# Altium PCB lte-router_V3.PcbDoc (part 2 of 2)
Units mm, origin at the board's own origin, x right, y up, seen from the top; angles counter-clockwise.
Board outline 80 x 50 mm, 4 copper layers (Top Layer, Inner Layer 2, Inner Layer 3, Bottom Layer), stack 1.443 mm thick; 105 components, 103 nets, 432 pads, 350 vias.
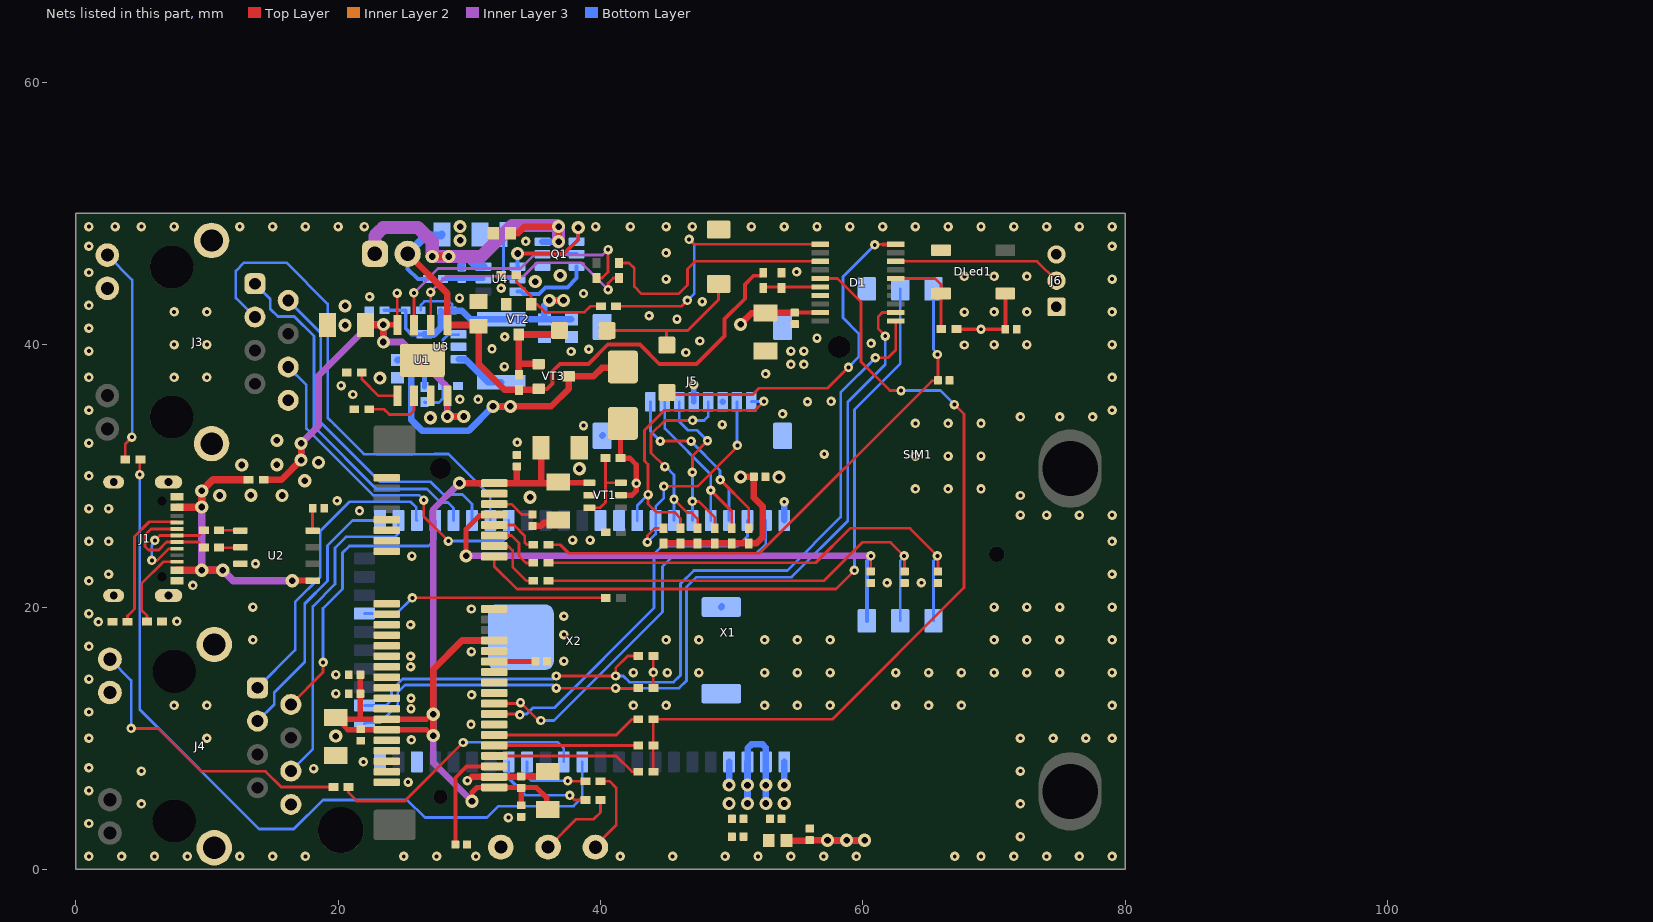
[diagram p4: the nets of this part, all layers, seen from the top]

## Via types
v1: diameter 0.72, hole 0.3, Top Layer to Bottom Layer, tented both sides, 291 vias
v2: diameter 1, hole 0.5, Top Layer to Bottom Layer, tented both sides, 59 vias

## Nets (pads, with @x,y where several pads share a name; then routed paths per layer and width w, separated by ;. In a path a pad name is that pad's centre, name@x,y a point inside that pad or via, vN(x,y) a via of type N, cw(c..) or ccw(c..) an arc to the next point about the centre after c; other vN are vias at no path point) (continued)
GND: C1.2 C2.2 C3.2 C4.1 C5.1 C6.2 C7.2 C8.2 C9.2 C10.1 C11.1 C12.1 C13.2 C14.1 C15.1 C16.1 C17.1 C18.2 C19.1 C20.1 C21.1 C22.1 C24.1 C25.1 C26.1 C27.1 C28.1 C29.2 C30.2 C32.2 C33.1 C34.2 D1.7 DLed1.3 GND.1 J1.1 J1.12 J1.SH J3.8 J3.MH1 J3.MH2 J4.8 J4.MH1 J4.MH2 J5.6 J5.9 J5.10 J5.11 J5.12 J6.1 J6.3 Q1.1 R3.1 R4.1 R5.1 R6.1 R9.2 R10.2 R20.1 R26.1 R32.1 R37.1 R39.1 SIM1.5 SW1.1 U1.3 U1.9 U2.3 U3.2 VT1.5 VT2.2 X1.4 X1.9 X1.15 X1.18 X1.21 X1.26 X1.27 X1.29 X1.34 X1.35 X1.37 X1.40 X1.43 X1.50 X2.1 X2.4 X2.21 X2.23 X2.46 X2.47 X2.56 X2.57 X2.58 X2.59 | length 14.2
  Top Layer w0.21: v1@13.69,23.29 v1(13.7,23.3)
  Top Layer w0.221: v1(20.225,36.875) v1@20.285,36.936
  Top Layer w0.3: v1(21.125,36.2) v1@21.175,36.15 ; R4.1@21.175,35.125 R4.1@21.225,35.075
  Top Layer w0.4: v1(32.973,3.948) v1@32.98,3.955 ; v1@33.625,32.525 v1(33.65,32.55)
  Top Layer w0.5: v1(29.851,6.775) 29.911,6.775 30.186,7.05 X1.50@31.9,7.05 33.91,7.05 C12.1@33.95,7.09 35.59,7.09 C3.2@35.975,7.475 ; C30.2@34.81,26.18 35.455,26.18 35.714,26.439 36.609,26.439 C13.2@36.79,26.62 ; v2@38.382,30.547 v2(38.39,30.54) ; C24.1@52.565,29.925 C24.1@52.59,29.9
  Inner Layer 3 w0.5: v1@61.825,21.85 v1(61.85,21.85)
  Inner Layer 2 w0.21: v1@30.15,13.475 v1@30.175,13.45
  Bottom Layer w0.5: v1@22.375,43.625 v1(22.4,43.65) ; v2(23.176,37.452) v2@23.199,37.475 ; J5.12@40.125,33.05 J5.12@40.175,33.1 ; J5.11@40.125,41.3 40.1,41.325 J5.11@40.125,41.35 ; X2.57@49.2,20 X2.57@49.25,20.05 ; v2(49.8,6.425) X2.4@49.8,8.2 ; v2(54,6.425) X2.1@54,8.2 ; X2.56@54,26.6 v1(54,28.025)
  other v1: 1,1 3.5,1 6,1 8.5,1 12.5,1 15,1 17.5,1 25,1 27.5,1 30.5,1 41.5,1 45.5,1 49.5,1 52,1 54.5,1 57,1 59.5,1 67,1 69,1 71.5,1 74,1 76.5,1 79,1 72,2.5 1,3.5 5,5 72,5 1,6 25.326,6.65 5,7.5 72,7.5 18.125,7.68 1,7.75 21.925,8.2 25.575,9.875 1,10 10,10 72,10 74.5,10 77,10 79,10 30.125,11.05 1,12 25.55,12.25 7.5,12.5 10,12.5 42.5,12.5 45,12.5 52.5,12.5 55,12.5 57.5,12.5 62.5,12.5 65,12.5 67.5,12.5 79,12.5 25.55,13.05 30.175,13.3 19.825,13.4 1,14.5 19.825,14.85 42.5,15 45.1,15 47.5,15 52.5,15 55,15 57.5,15 62.5,15 65,15 67.5,15 70,15 72.5,15 75,15 79,15 25.525,15.45 37.2,15.875 25.525,16.25 30.15,16.6 1,17 13.5,17.5 45,17.5 47.5,17.5 52.5,17.5 55,17.5 57.5,17.5 70,17.5 72.5,17.5 75,17.5 79,17.5 37.2,17.9 25.525,18.65 1.725,18.875 7.7,18.9 37.2,19.3 1,19.5 30.15,19.85 13.5,20 70,20 72.5,20 75,20 79,20 8.925,21.65 64.45,21.85 1,22 2.5,22.5 79,22.5 25.625,23.875 1,25 2.5,25 79,25 37.875,25.1 39.2,25.1 72,27 74,27 76.5,27 79,27 21.626,27.326 1,27.5 2.5,27.5 19.925,28.1 72,28.5 64,29 66.5,29 69,29 1,30 64,31.5 66.5,31.5 69,31.5 57.05,31.65 1,32.5 38.7,33.825 49.275,33.9 64,34 66.5,34 69,34 72,34.5 75,34.5 77.5,34.5 53.875,34.725 1,35 79,35 55.775,35.65 57.575,35.675 29.275,35.825 30.675,35.825 1,37.5 7.5,37.5 10,37.5 79,37.5 52.575,37.775 32.675,38.325 54.5,38.5 55.5,38.5 46.5,39.402 37.752,39.477 1,39.5 54.5,39.5 55.5,39.5 39.1,39.65 31.725,39.675 67.725,39.975 7.5,40 10,40 70,40 72.5,40 79,40 60.625,40.1 47.577,40.277 56.5,40.5 32.7,40.6 1,41.25 45.827,41.952 43.702,42.202 67.725,42.475 7.5,42.5 10,42.5 70,42.5 72.5,42.5 79,42.5 1,43 47.75,43.275 29.25,43.55 38.7,43.9 32.425,44.3 45,45 79,45 67.725,45.2 70,45.2 72.5,45.2 1,45.5 54.95,45.55 45,47 1,47.5 79,47.5 34.3,47.875 1,49 3,49 5,49 7.5,49 12.5,49 15,49 17.5,49 20,49 22,49 39.625,49 42.275,49 45,49 47,49 51.5,49 54,49 56.5,49 59,49 61.5,49 64,49 66.5,49 69,49 71.5,49 74,49 76.5,49 79,49
  other v2: 49.8,5.025 54,5.025 19.82,10.16 34.63,28.37 10.975,28.5 15.725,28.5 13.35,28.525 17.45,29.625 53.6,29.9 12.65,30.825 15.325,30.85 18.5,31.025 15.325,32.7 27.026,34.427 20.525,41.475 20.525,42.95 35.025,44.8 36.925,45.275 29.3,47.95 29.3,49
HLK-7688A_EPHY_LED0: J4.9 R36.1 | length 23.2
  Top Layer w0.21: v1(4.225,10.75) 6.3,10.75 9.57,7.48 14.462,7.48 15.662,6.28 R36.1@19.635,6.28
  Bottom Layer w0.21: J4.9@2.605,16.025 4.225,14.405 v1(4.225,10.75)
HLK-7688A_EPHY_LED1: J3.9 R35.1 | length 16.6
  Top Layer w0.21: R35.1@3.775,31.25 3.775,32.45 v1(4.275,32.95)
  Bottom Layer w0.21: J3.9@2.405,46.825 4.3,44.93 4.3,32.975 v1(4.275,32.95)
HLK-7688A_MDI_RN_P0: J4.6 X2.35 | length 24.7
  Bottom Layer w0.21: J4.6@16.395,7.495 18.07,9.17 18.07,20.05 19.763,21.743 19.763,24.513 20.6,25.35 24.325,25.35 24.583,25.608 24.583,26.583 X2.35@24.6,26.6
HLK-7688A_MDI_RN_P1: J3.6 X2.41 | length 26.3
  Top Layer w0.21: v1(26.525,28.15) 26.525,26.9 v1(28.4,25.025)
  Bottom Layer w0.21: J3.6@16.195,38.295 17.575,36.915 17.575,33.6 22.65,28.525 26.153,28.525 26.525,28.153 v1(26.525,28.15) ; v1(28.4,25.025) 32.575,25.025 33,25.45 X2.41@33,26.6
HLK-7688A_MDI_RP_P0: J4.3 X2.34 | length 20.4
  Bottom Layer w0.21: J4.3@13.855,11.305 15.125,12.575 15.125,13.5 17.45,15.825 17.45,20.25 19.188,21.988 19.188,24.687 21.1,26.6 X2.34@23.2,26.6
HLK-7688A_MDI_RP_P1: J3.3 X2.40 | length 38.1
  Bottom Layer w0.21: J3.3@13.655,42.105 12.2,43.56 12.2,45.625 12.825,46.25 16.05,46.25 19.2,43.1 19.2,34.425 19.747,33.878 21.975,31.65 27.323,31.65 27.338,31.665 28.41,31.665 31.6,28.475 X2.40@31.6,26.6
HLK-7688A_MDI_TN_P0: J4.2 X2.37 | length 22.1
  Top Layer w0.21: J4.2@16.395,12.575 18.85,15.03 v1(18.85,15.775)
  Bottom Layer w0.21: v1(18.85,15.775) 18.85,19.9 20.338,21.388 20.338,24.138 20.85,24.65 26.875,24.65 27.4,25.175 X2.37@27.4,26.6
HLK-7688A_MDI_TN_P1: J3.2 X2.39 | length 25.7
  Bottom Layer w0.21: J3.2@16.195,43.375 18.675,40.895 18.675,34.075 23.2,29.55 27.05,29.55 28.025,28.575 29.475,28.575 30.2,27.85 X2.39@30.2,26.6
HLK-7688A_MDI_TP_P0: J4.1 X2.36 | length 23.4
  Bottom Layer w0.21: J4.1@13.855,13.845 16.725,16.715 16.725,20.375 18.638,22.288 18.638,25.787 20.875,28.025 25.525,28.025 25.958,27.592 25.958,26.642 X2.36@26,26.6
HLK-7688A_MDI_TP_P1: J3.1 X2.38 | length 27.7
  Bottom Layer w0.21: J3.1@13.655,44.645 14.825,43.475 14.825,42.725 15.4,42.15 16.65,42.15 18.15,40.65 18.15,33.75 22.9,29 26.775,29 27.8,27.975 28.375,27.975 28.8,27.55 X2.38@28.8,26.6
HLK-7688A_UART_RXD1: R22.1 RX.1 | length 5.9
  Top Layer w0.21: RX.1@36.1,1.8 38.125,3.825 39.475,3.825 40,4.35 R22.1@40,5.3
HLK-7688A_UART_TXD1: R21.1 TX.1 | length 6.5
  Top Layer w0.21: TX.1@39.609,1.805 41.2,3.396 41.2,6.2 40.675,6.725 R21.1@40,6.725
LTE_LED: D1.5 R16.2 R17.2 R18.2 | length 63
  Top Layer w0.21: R18.2@44.025,7.45 R17.2@44.025,9.45 R16.2@44.025,11.45 57.675,11.45 67.7,21.475 67.7,34.7 v1(66.975,35.425) ; D1.5@56.75,45.05 58.05,45.05 59.85,43.25 59.85,38.7 62.05,36.5 v1(62.9,36.5)
  Bottom Layer w0.21: v1(62.9,36.5) 65.9,36.5 v1(66.975,35.425)
NetC6_1: C6.1 C32.1 J2.2 R19.2 R23.2 R38.2 U1.5 VT3.2 | length 47.6
  Top Layer w0.3: VT3.2@35.275,36.625 35.925,36.625 36.35,37.05 36.35,37.975 36.9,38.525 39.075,38.525 40.55,40 43,40 44.475,38.525 47.325,38.525 49.45,40.65 49.45,41.95 51,43.5 51,44.597 51.653,45.25 52.25,45.25 52.4,45.4 R23.2@52.4,45.475
  Top Layer w0.5: J2.2@25.3,46.925 28.33,43.895 U1.5@28.33,41.5 30.61,41.5 C6.1@30.7,41.41 30.7,38.55 32.7,36.55 R19.2@33.775,36.55 35.2,36.55 VT3.2@35.275,36.625
  Bottom Layer w0.3: J2.2@25.3,46.925 25.3,45.775 26.075,45 R38.2@26.85,45
  Bottom Layer w0.6: J2.2@25.3,46.925 26.701,48.326 27.826,48.326 C32.1@27.9,48.4
NetC7_1: C7.1 U2.8 | length 1.7
  Top Layer w0.21: U2.8@18.05,25.83 18.05,27.515 C7.1@18.06,27.525
NetC8_1: C8.1 R2.2 U1.4 U1.8 | length 39.6
  Top Layer w0.21: U1.8@24.495,41.525 24.5,41.53 v1(24.5,43.925)
  Top Layer w0.4: v2(23.45,41.525) U1.8@24.495,41.525 ; v1(24.5,43.925) 24.5,43.975 v1@24.52,43.995 ; v2(28.325,34.525) 28.325,34.536 28.33,34.541 U1.4@28.33,36.1
  Top Layer w0.5: R2.2@14.325,29.7 15.675,29.7 v2(17.175,31.2) v2(17.175,32.475) ; C8.1@22.1,41.5 v2@23.4,41.5 ; v2(23.45,40.2) v2@23.45,41.45 ; v2(28.325,34.525) v2(29.575,34.525)
  Inner Layer 3 w0.5: v2(17.175,31.2) v2(17.175,32.475) 18.5,33.8 18.5,37.625 22.425,41.55 v2@23.45,41.55 ; v2(23.45,41.525) v2(23.45,40.2) 24.875,40.2 28.325,36.75 v2(28.325,34.525) v2(29.575,34.525)
  Bottom Layer w0.5: v2(28.325,34.525) v2(29.575,34.525)
NetC15_2: C15.2 C16.2 C17.2 L1.2 X2.2 X2.3 | length 10.1
  Bottom Layer w0.5: v2(51.2,5.025) v2(51.2,6.425) X2.3@51.2,8.2 51.207,8.207 51.207,9.232 51.5,9.525 52.35,9.525 52.6,9.275 X2.2@52.6,8.2 v2(52.6,6.425) v2(52.6,5.025)
NetC23_1: C23.1 R31.1 R32.2 U3.5 | length 7.4
  Bottom Layer w0.3: R32.2@23.525,42.62 R31.1@25.15,42.62 25.15,41.225 25.6,40.775 U3.5@26.575,40.775
  Bottom Layer w0.5: U3.5@26.575,40.775 27.3,40.775 27.835,41.31 C23.1@27.835,42.6
NetC28_2: C28.2 X1.28 | length 3.1
  Top Layer w0.4: X1.28@31.9,15.85 35.02,15.85 C28.2@35.04,15.87
NetC29_1: C29.1 X1.48 | length 8.4
  Top Layer w0.3: C29.1@28.93,1.9 28.93,6.99 29.79,7.85 X1.48@31.9,7.85
NetC30_1: C30.1 X1.6 | length 3.2
  Top Layer w0.21: X1.6@31.9,27.85 31.91,27.84 33.21,27.84 33.99,27.06 C30.1@34.81,27.06
NetC31_1: C31.1 J2.1 Q1.3 R20.2 U4.6 | length 33.2
  Top Layer w0.5: R20.2@33.125,48.5 33.725,48.5 34.225,49 v2(36.8,49) v2@36.8,47.829
  Top Layer w0.6: v2(27.175,46.72) v2(28.425,46.72)
  Inner Layer 3 w0.5: v2@36.8,47.829 v2@36.802,47.827
  Inner Layer 3 w1: J2.1@22.8,46.925 22.8,48.287 23.07,48.557 23.07,48.57 23.425,48.925 26.1,48.925 27.175,47.85 v2(27.175,46.72) v2(28.425,46.72) 30.895,46.72 33.265,49.09 36.71,49.09 v2(36.8,49) v2@36.8,47.829
  Bottom Layer w0.5: Q1.3@35.575,47.85 35.586,47.839 36.79,47.839 36.802,47.827 v2@36.802,48.998
  Bottom Layer w0.6: v2(27.175,46.72) v2(28.425,46.72) 29.362,46.72 ; C31.1@29.425,45.89 29.425,46.657 29.362,46.72 ; U4.6@31.07,45.95 30.525,45.95 29.755,46.72 29.362,46.72
  other v2: 36.802,47.85
NetC31_2: C31.2 R38.1 U4.5 | length 3.1
  Bottom Layer w0.3: R38.1@28,45 28.058,45 28.065,44.992 29.408,44.992 C31.2@29.425,45.01 29.435,45 U4.5@31.07,45
NetD1_6: D1.6 R23.1 R39.2 | length 4.3
  Top Layer w0.21: R23.1@52.4,44.4 53.9,44.4 D1.6@56.75,44.4
NetD1_16: D1.16 DLed1.4 R46.1 | length 7
  Top Layer w0.21: D1.16@62.5,45.05 65.5,45.05 65.95,44.6 DLed1.4@65.95,43.9 65.95,41.225 R46.1@65.975,41.2
NetJ1_4: J1.4 R10.1 | length 10.4
  Top Layer w0.21: R10.1@3.95,18.875 3.95,19.329 4.475,19.854 4.475,25.375 5.6,26.5 7.192,26.5 7.202,26.49 7.67,26.49 J1.4@7.71,26.45
NetJ1_5: J1.5 J1.7 R8.2 | length 8.5
  Top Layer w0.21: J1.5@7.71,25.95 5.725,25.95 5.275,25.5 5.275,24.625 5.55,24.35 6.325,24.35 6.925,24.95 J1.7@7.71,24.95 9.35,24.95 R8.2@9.775,24.525
NetJ1_6: J1.6 J1.8 R7.2 | length 8.1
  Top Layer w0.21: v1(5.8,23.551) 6.201,23.551 7.1,24.45 J1.8@7.71,24.45 ; v1(6.025,25.075) 6.4,25.45 J1.6@7.71,25.45 9.375,25.45 R7.2@9.775,25.85
  Inner Layer 2 w0.21: v1@5.662,23.551 v1(5.8,23.551)
  Bottom Layer w0.21: v1(5.8,23.551) 5.8,24.712 6.025,24.937 v1(6.025,25.075)
NetJ1_10: J1.10 R6.2 | length 6.4
  Top Layer w0.21: R6.2@5.425,18.9 5.425,19.354 5.025,19.754 5.025,21.781 6.694,23.45 J1.10@7.71,23.45
NetJ5_1: J5.1 R43.1 X2.53 | length 17.5
  Top Layer w0.21: v1(44.55,32.65) 46.85,32.65 46.875,32.625 v1(46.9,32.65) ; v1(49.125,29.7) 51.3,27.525 R43.1@51.3,26
  Bottom Layer w0.21: J5.1@43.8,35.65 43.8,33.4 v1(44.55,32.65) ; v1(46.9,32.65) 46.887,32.637 49.112,30.412 49.112,29.713 49.8,29.025 X2.53@49.8,26.6
NetJ5_2: J5.2 R44.1 X2.52 | length 14.1
  Top Layer w0.21: v1(48.4,28.9) 50,27.3 R44.1@50,26
  Bottom Layer w0.21: J5.2@44.9,35.65 44.9,33.6 48.4,30.1 X2.52@48.4,26.6
NetJ5_3: J5.3 R41.1 X2.51 | length 13.9
  Top Layer w0.21: v1(47,28.05) 47.5,28.05 48.7,26.85 R41.1@48.7,26 ; v1(47,30.275) 47,31.525 v1(48.15,32.675)
  Bottom Layer w0.21: J5.3@46,35.65 46,34.15 46.675,33.475 47.35,33.475 v1(48.15,32.675) ; X2.51@47,26.6 v1(47,30.275)
NetJ5_5: J5.5 R42.1 X2.50 | length 16.5
  Top Layer w0.21: v1(44.9,30.7) 43.85,31.75 43.85,33.175 44.9,34.225 v1(47.025,34.225) ; v1(45.6,28.2) 46.6,27.2 46.925,27.2 47.4,26.725 R42.1@47.4,26
  Bottom Layer w0.21: v1(44.9,30.7) 44.975,30.7 45.6,30.075 X2.50@45.6,26.6 ; v1(47.025,34.225) 47.9,34.225 48.2,34.525 J5.5@48.2,35.65
NetJ5_7: J5.7 R45.1 X2.49 | length 17.2
  Top Layer w0.21: v1(43.575,24.95) 43.575,25.45 44.125,26 R45.1@44.8,26 ; v1(44.825,29.2) 47.375,29.2 50.425,32.25 v1(50.425,32.325)
  Bottom Layer w0.21: v1(43.575,24.95) 44.2,25.575 X2.49@44.2,26.6 44.2,27.675 44.825,28.3 v1(44.825,29.2) ; J5.7@50.4,35.65 50.4,32.225 50.425,32.25 v1(50.425,32.325)
NetJ5_8: J5.8 R40.1 X2.48 | length 22.7
  Top Layer w0.21: R40.1@46.1,26 46.1,26.75 45.625,27.225 44.25,27.225 43.625,27.85 v1(43.625,28.575) 43.625,30.875 43.35,31.15 43.35,33.475 44.875,35 51.775,35 v1(52.45,35.675)
  Bottom Layer w0.21: X2.48@42.8,26.6 42.8,27.75 v1(43.625,28.575) ; J5.8@51.5,35.65 51.525,35.675 v1(52.45,35.675)
NetL2_1: L2.1 U3.3 | length 4
  Bottom Layer w0.5: U3.3@29.175,38.875 29.7,38.875 31.452,37.123 L2.1@32.425,37.123
NetQ1_2: Q1.2 Q1.5 | length 2.6
  Bottom Layer w0.3: Q1.2@35.575,46.9 Q1.5@38.175,46.9
NetQ1_4: Q1.4 U4.1 | length 8.1
  Top Layer w0.3: v2(33.675,46.95) 37.225,46.95 38.3,48.025 v2(38.3,48.925)
  Bottom Layer w0.3: U4.1@33.67,45.95 33.7,45.95 33.675,45.975 v2(33.675,46.95) ; Q1.4@38.175,47.85 38.3,47.975 v2(38.3,48.925)
NetQ1_6: Q1.6 U4.3 | length 5.9
  Bottom Layer w0.3: U4.3@33.67,44.05 33.945,44.05 34.12,43.875 35.316,43.875 35.808,44.367 37.467,44.367 38.175,45.075 Q1.6@38.175,45.95
NetR1_1: R1.1 VT1.3 VT1.6 | length 5.9
  Top Layer w0.21: VT1.6@39.15,27.575 39.975,27.575 40.375,27.975 40.375,29.475 ; R1.1@40.375,31.35 40.375,29.475 ; VT1.3@41.55,29.475 40.375,29.475
NetR1_2: R1.2 VD3.1 VT1.2 | length 7.4
  Top Layer w0.4: VT1.2@41.55,28.525 42.4,28.525 42.725,28.85 v1(42.725,29.425) 42.725,30.85 42.237,31.338 41.537,31.338 R1.2@41.525,31.35 41.525,33.825 VD3.1@41.7,34
NetR3_2: R3.2 U1.1 | length 3.7
  Top Layer w0.21: R3.2@21.8,37.875 21.8,37.375 23.075,36.1 U1.1@24.52,36.1
NetR4_2: R4.2 U1.2 | length 4.8
  Top Layer w0.21: R4.2@22.375,35.075 23.5,35.075 23.9,34.675 25.475,34.675 25.79,34.99 U1.2@25.79,36.1
NetR5_2: R5.2 R27.1 VT2.1 | length 8.5
  Top Layer w0.21: R5.2@33.575,45.3 33.575,44.825 34.7,43.7 VT2.1@34.7,43.075 35.175,43.075 35.775,42.475 38.775,42.475 39.225,42.925 R27.1@40.025,42.925
NetR7_1: R7.1 U2.1 | length 1.6
  Top Layer w0.21: R7.1@10.925,25.85 12.53,25.85 U2.1@12.55,25.83
NetR8_1: R8.1 U2.2 | length 1.6
  Top Layer w0.21: R8.1@10.925,24.525 12.515,24.525 U2.2@12.55,24.56
NetR11_1: R11.1 U1.7 | length 21.4
  Top Layer w0.21: v1(25.775,43.95) 25.79,43.935 U1.7@25.79,41.5 ; R11.1@39.7,45.075 40.125,45.075 40.575,45.525 v1(40.575,47.25)
  Inner Layer 3 w0.21: v1(25.775,43.95) 27.625,45.8 33.9,45.8 34.925,46.825 40.15,46.825 v1(40.575,47.25)
NetR12_1: R12.1 U1.6 | length 19.3
  Top Layer w0.21: v1@27.05,44.025 27.06,44.015 U1.6@27.06,41.5 ; v1(40.575,44.2) 40.575,44.675 40.975,45.075 R12.1@41.4,45.075
  Inner Layer 3 w0.21: v1(27.05,44) 28.262,45.213 34.137,45.213 35.175,46.25 38.525,46.25 v1(40.575,44.2)
NetR13_1: R13.1 X1.10 | length 3.9
  Top Layer w0.21: X1.10@31.9,26.25 33.4,26.25 34.225,25.425 34.225,24.925 34.4,24.75 R13.1@34.875,24.75
NetR14_1: R14.1 X1.12 | length 4.4
  Top Layer w0.21: X1.12@31.9,25.45 33.2,25.45 33.775,24.875 33.775,23.9 34.325,23.35 34.85,23.35 R14.1@34.875,23.375
NetR15_1: R15.1 X1.14 | length 4.8
  Top Layer w0.21: X1.14@31.9,24.65 32.95,24.65 33.3,24.3 33.3,23.05 34.35,22 R15.1@34.875,22
NetR16_1: R16.1 X1.42 | length 11.5
  Top Layer w0.21: X1.42@31.9,10.25 41.195,10.25 42.395,11.45 R16.1@42.875,11.45
NetR17_1: R17.1 X1.44 | length 11
  Top Layer w0.21: X1.44@31.9,9.45 R17.1@42.875,9.45
NetR18_1: R18.1 X1.46 | length 11.5
  Top Layer w0.21: X1.46@31.9,8.65 41.195,8.65 42.395,7.45 R18.1@42.875,7.45
NetR19_1: R19.1 VD1.2 VT2.3 VT3.1 | length 7.8
  Top Layer w0.5: R19.1@33.775,37.7 33.775,38.55 ; VT3.1@35.275,38.525 35.25,38.55 33.775,38.55 ; VD1.2@36.875,41.075 36.575,40.775 VT2.3@33.75,40.775 33.775,40.75 33.775,38.55
NetR21_2: R21.2 X2.15 | length 5.7
  Top Layer w0.21: v1(37.502,6.75) 37.527,6.725 R21.2@38.85,6.725
  Bottom Layer w0.21: X2.15@34.4,8.2 34.4,7.074 34.724,6.75 v1(37.502,6.75)
NetR22_2: R22.2 X2.16 | length 7.8
  Top Layer w0.21: v1(37.65,5.65) 38,5.3 R22.2@38.85,5.3
  Bottom Layer w0.21: X2.16@33,8.2 33,6.95 34.3,5.65 v1(37.65,5.65)
NetR24_2: R24.2 X2.30 | length 18.9
  Top Layer w0.21: v1(25.65,20.7) R24.2@40.4,20.7
  Bottom Layer w0.21: X2.30@22,19.5 24.45,19.5 v1(25.65,20.7)
NetR25_1: R25.1 R26.2 U3.1 | length 7.4
  Bottom Layer w0.21: R25.1@26.575,35.625 26.6,35.6 27.675,35.6 27.975,35.9 R26.2@27.975,36.85 27.975,36.895 27.975,40.35 28.383,40.758 29.158,40.758 U3.1@29.175,40.775
NetR35_2: R35.2 X2.12 | length 61.4
  Top Layer w0.21: v1(4.875,30.1) 4.875,31.2 R35.2@4.925,31.25
  Bottom Layer w0.21: v1(4.875,30.1) 4.875,12.175 13.975,3.075 16.615,3.075 18.84,5.3 25.26,5.3 26.61,3.95 31.35,3.95 32.225,4.825 37.95,4.825 38.6,5.475 X2.12@38.6,8.2
NetR36_2: R36.2 X2.13 | length 20.2
  Top Layer w0.21: R36.2@20.785,6.28 20.785,5.865 21.425,5.225 25.075,5.225 v1(29.525,9.675)
  Bottom Layer w0.21: v1(29.525,9.675) 29.55,9.7 36.725,9.7 37.2,9.225 X2.13@37.2,8.2
NetR37_2: R37.2 U4.2 | length 3.7
  Bottom Layer w0.21: R37.2@32.6,47.825 32.6,45.375 32.95,45.025 33.645,45.025 U4.2@33.67,45
NetSW1_2: SW1.2 VD1.1 VD2.1 | length 11.8
  Top Layer w0.21: VD1.1@40.475,41.075 45.025,41.075 ; VD2.1@45.048,39.958 45.025,39.981 45.025,41.075 ; SW1.2@49,44.625 49,43.425 46.65,41.075 45.025,41.075
PD3: D1.20 VD2.2 | length 27.7
  Top Layer w0.21: VD2.2@45.048,36.358 45.206,36.2 51.6,36.2 52.075,36.675 57.3,36.675 v1(58.9,38.275) ; v1(60.9,47.6) 60.85,47.6 60.8,47.65 61.525,47.65
  Top Layer w0.3: 61.525,47.65 D1.20@62.5,47.65
  Bottom Layer w0.21: v1(58.9,38.275) 59.675,39.05 59.675,40.85 58.475,42.05 58.475,45.175 v1(60.9,47.6)
PD4: D1.1 R27.2 | length 20.8
  Top Layer w0.21: R27.2@41.175,42.925 46.175,42.925 v1(46.625,43.375) ; v1(46.75,48.025) 47.125,47.65 D1.1@56.75,47.65
  Bottom Layer w0.21: v1(46.625,43.375) 47.15,43.9 47.15,47.625 v1(46.75,48.025)
PERN0: X1.23
PERP0: X1.25
PETN0: X1.31
PETP0: X1.33
REFCLK+: X1.13
REFCLK-: X1.11
RSVRD45: X1.45
RSVRD47: X1.47
RSVRD49: X1.49
RSVRD51: X1.51
S\T\D\B\Y\: D1.3 R12.2 | length 18.9
  Top Layer w0.21: R12.2@41.4,46.225 42.175,46.225 42.575,45.825 42.575,44.425 43.125,43.875 45.95,43.875 46.625,44.55 46.625,45.775 47.2,46.35 D1.3@56.75,46.35
SCL: D1.12 R30.2 X2.24 | length 68.3
  Top Layer w0.21: v1(36.625,13.815) v1(41.15,13.815) R30.2@42.875,13.815 ; v1(61.7,40.653) 61.7,40.68 61.175,41.205 61.175,42.15 61.475,42.45 D1.12@62.5,42.45
  Bottom Layer w0.21: X2.24@22,11.1 22.105,11.205 23.206,11.205 24.535,12.534 24.535,13.484 25.101,14.05 36.39,14.05 v1(36.625,13.815) ; v1(41.15,13.815) 45.991,13.815 46.56,14.384 46.56,21.525 47.31,22.275 54.55,22.275 58.85,26.575 58.85,35.65 61.7,38.5 v1(61.7,40.653)
SDA: D1.11 R29.2 X2.25 | length 67.1
  Top Layer w0.21: v1(36.625,14.745) v1(41.15,14.745) 41.15,15.35 42.075,16.275 R29.2@42.875,16.275 ; v1(60.95,39) 61.9,39 62.5,39.6 D1.11@62.5,41.8
  Bottom Layer w0.21: X2.25@22,12.5 23.65,12.5 24.075,12.925 24.075,13.675 24.91,14.51 36.39,14.51 v1(36.625,14.745) ; v1(41.15,14.745) 41.731,14.745 42.201,14.275 45.575,14.275 46.1,14.8 46.1,21.776 47.109,22.785 54.235,22.785 58.3,26.85 58.3,36.35 v1(60.95,39)
SMB_CLK: X1.30
SMB_DATA: X1.32
SWIO: D1.18 J6.2 | length 12.9
  Top Layer w0.21: D1.18@62.5,46.35 73.275,46.35 J6.2@74.75,44.875
UIM_C4: X1.19
UIM_C8: X1.17
USB_D_N: X1.36 X2.55 | length 30.7
  Top Layer w0.21: X1.36@31.9,12.65 33.835,12.65 v1(33.9,12.715) 35.265,11.35 v1(35.45,11.35)
  Inner Layer 3 w0.21: v1@35.425,11.325 v1(35.45,11.35)
  Bottom Layer w0.21: v1(35.45,11.35) 36.45,11.35 44.715,19.615 44.715,23.085 45.64,24.01 51.79,24.01 52.6,24.82 X2.55@52.6,26.6
USB_D_P: X1.38 X2.54 | length 28.6
  Top Layer w0.21: X1.38@31.9,11.85 33.835,11.85 v1@33.9,11.785
  Bottom Layer w0.21: v1@33.9,11.785 33.962,11.847 34.372,11.847 34.85,12.325 36.475,12.325 44.075,19.925 44.075,24.05 44.65,24.625 50.425,24.625 51.2,25.4 X2.54@51.2,26.6
  other v1: 33.85,11.785
USIM_CLK: C22.2 R14.2 SIM1.3 | length 37.9
  Top Layer w0.21: R14.2@36.025,23.375 56.4,23.375 59.025,26 63.58,26 v1(65.68,23.9) 65.725,23.855 C22.2@65.725,22.715
  Bottom Layer w0.21: SIM1.3@65.38,18.95 65.38,23.522 65.68,23.822 v1(65.68,23.9)
USIM_DATA: C27.2 R13.2 SIM1.7 | length 42.6
  Top Layer w0.21: R13.2@36.025,24.75 36.925,24.75 37.575,24.1 52.125,24.1 65.268,37.243 C27.2@65.71,37.243 ; v1(65.675,39.25) 65.717,39.208 65.717,37.385 65.71,37.378 C27.2@65.71,37.275
  Bottom Layer w0.21: SIM1.7@65.38,44.25 65.38,39.628 65.675,39.333 v1(65.675,39.25) v1@65.675,39.186
USIM_POWER: C20.2 SIM1.1 X1.8 | length 41.8
  Top Layer w0.21: C20.2@60.6,22.715 v1(60.6,23.9)
  Top Layer w0.4: v2(29.748,23.902) 29.748,25.93 30.773,26.955 31.805,26.955 X1.8@31.9,27.05
  Inner Layer 3 w0.4: v2(29.748,23.902) v2@29.75,23.9
  Inner Layer 3 w0.5: v2@29.75,23.9 v1(60.6,23.9)
  Bottom Layer w0.3: SIM1.1@60.3,18.95 60.3,23.514 60.6,23.814 v1(60.6,23.9)
USIM_RESET: C21.2 R15.2 SIM1.2 | length 35
  Top Layer w0.21: R15.2@36.025,22 57.014,22 59.945,24.93 62.11,24.93 v1(63.14,23.9) 63.175,23.865 C21.2@63.175,22.715
  Bottom Layer w0.21: SIM1.2@62.84,18.95 62.84,23.522 63.14,23.822 v1(63.14,23.9)
USIM_VPP: SIM1.6 X1.16 | length 52.4
  Top Layer w0.21: X1.16@31.9,23.85 31.9,23.1 33.625,21.375 57.95,21.375 59.35,22.775 v1(59.35,22.8)
  Bottom Layer w0.21: v1(59.35,22.8) 59.35,35.05 62.84,38.54 SIM1.6@62.84,44.25
V_OUT: C1.1 C2.1 C3.1 C4.2 C5.2 C9.1 C10.2 C11.2 C12.2 C13.1 VT1.4 X1.2 X1.24 X1.39 X1.41 X1.52 | length 81.8
  Top Layer w0.4: C2.1@19.825,11.575 C2.1@19.95,11.45 ; 21.69,11.45 C2.1@19.95,11.45 ; C4.2@21.69,14.85 C5.2@21.69,13.4 21.69,11.585 21.825,11.45 X1.39@23.7,11.45 26.716,11.45 v2@27.091,11.825 ; C1.1@21.725,10.65 20.73,10.65 19.93,11.45 C2.1@19.95,11.45 ; C1.1@21.725,10.69 21.765,10.65 X1.41@23.7,10.65 26.716,10.65 v2@27.166,10.2 ; v2(30.2,5.2) 30.2,5.875 30.575,6.25 X1.52@31.9,6.25 35.1,6.25 35.907,5.443 35.907,4.575 C3.1@35.975,4.575 ; C11.2@33.95,4.89 C12.2@33.95,6.21 ; C13.1@36.79,29.52 36.835,29.475 VT1.4@39.15,29.475
  Top Layer w0.5: v2@27.166,10.2 27.25,10.284 v2(27.25,11.825) 27.25,15.25 29.45,17.45 X1.24@31.9,17.45 ; v2(29.25,29.45) X1.2@31.9,29.45 33.675,29.45 ; C10.2@33.625,30.71 33.625,29.5 33.675,29.45 ; C9.1@35.475,32.15 35.475,29.475 35.45,29.45 ; C13.1@36.79,29.52 36.72,29.45 35.45,29.45 ; 33.675,29.45 35.45,29.45
  Inner Layer 3 w0.5: v2(29.25,29.45) 27.25,27.45 v2(27.25,11.825) v2(27.25,10.2) 27.25,8.15 v2(30.2,5.2)
  Inner Layer 2 w0.5: v2(27.25,10.2) v2(27.25,11.825)
  Bottom Layer w0.5: v2(27.25,10.2) v2(27.25,11.825)
Vbus: J1.2 J1.11 R2.1 U2.5 | length 25.4
  Top Layer w0.45: v2(16.5,22) 16.52,22.02 U2.5@18.05,22.02
  Top Layer w0.55: J1.11@7.71,22.8 10,22.8 v2(11.2,22.8) ; J1.2@7.71,27.6 9.575,27.6 v2(9.6,27.625) v2(9.6,28.85) 10.45,29.7 R2.1@13.175,29.7
  Inner Layer 3 w0.55: v2(9.6,28.85) v2(9.6,27.625) v2(9.6,22.8) v2(11.2,22.8) 12,22 v2(16.5,22)
VCC3V3: C14.2 C18.1 C23.2 C24.2 C25.2 C26.2 C33.2 C34.1 D1.9 DLed1.1 J3.10 J4.10 J5.4 L1.1 L2.2 R29.1 R30.1 R31.2 R40.2 R41.2 R42.2 R43.2 R44.2 R45.2 R46.2 | length 59.6
  Top Layer w0.21: R30.1@44.025,13.815 v1(44.025,15.025) R29.1@44.025,16.275
  Top Layer w0.3: C34.1@52.575,42.4 C34.1@52.615,42.44 ; C18.1@54.8,42.44 54.81,42.45 D1.9@56.75,42.45 ; C14.2@55.915,2.2 C14.2@55.95,2.235 ; R46.2@67.125,41.2 67.15,41.175 v1(68.997,41.175) C33.2@70.845,41.175 70.85,41.18 DLed1.1@70.85,43.9
  Top Layer w0.5: v2(36.1,43.375) v2(37.175,43.375) ; R45.2@44.8,24.85 R40.2@46.1,24.85 R42.2@47.4,24.85 R41.2@48.7,24.85 R44.2@50,24.85 R43.2@51.3,24.85 51.875,24.85 52.35,25.325 52.35,27.675 51.685,28.34 C24.2@51.685,29.925 v2(50.675,29.925) ; v2(50.675,41.542) 50.675,41.575 51.5,42.4 C34.1@52.575,42.4 ; C34.1@52.615,42.44 C18.1@54.8,42.44 ; L1.1@54.175,2.2 C14.2@55.915,2.2 ; C14.2@55.95,2.235 57.29,2.235 v2(57.3,2.225) v2(58.75,2.225) v2(60.125,2.225)
  Inner Layer 3 w0.5: v2(36.1,43.375) v2(37.175,43.375) ; v2(57.3,2.225) v2(58.75,2.225) v2(60.125,2.225)
  Bottom Layer w0.21: R31.2@26.3,42.62 26.3,43.025 26.575,43.3 28.45,43.3 28.7,43.05 28.7,42.615 C23.2@28.715,42.6
  Bottom Layer w0.4: J5.4@47.1,35.65 v1(47.1,36.95)
  Bottom Layer w0.5: C23.2@28.715,42.6 29.425,42.6 30.098,41.927 L2.2@32.425,41.927 35.723,41.927 C25.2@35.725,41.925 ; v2(37.175,43.375) v2(36.1,43.375) 35.725,43 C25.2@35.725,41.925 ; C26.2@37.775,41.925 C25.2@35.725,41.925 ; v2(57.3,2.225) v2(58.75,2.225) v2(60.125,2.225)
VCC4V0: C19.2 R25.2 U3.4 VD3.2 VT3.3 | length 29.1
  Top Layer w0.5: v2(31.8,35.3) v2(33.125,35.3) 36.25,35.3 37.575,36.625 VT3.3@37.575,37.575 39.45,37.575 40.1,38.225 41.625,38.225 VD3.2@41.7,38.3
  Bottom Layer w0.4: U3.4@26.562,38.863 26.575,38.85 R25.2@26.575,36.775
  Bottom Layer w0.5: C19.2@24.525,38.825 24.563,38.863 25.563,38.863 ; U3.4@26.562,38.863 25.563,38.863 ; v2(33.125,35.3) v2(31.8,35.3) 29.925,33.425 26.425,33.425 25.563,34.287 25.563,38.863
WAKE: X1.1
pads on no net: D1.4 D1.8 D1.10 D1.13 D1.14 D1.15 D1.17 D1.19 DLed1.2 J1.3 J1.9 J1.CM J3.4 J3.5 J3.7 J3.11 J3.12 J3.MH3 J3.MH4 J4.4 J4.5 J4.7 J4.11 J4.12 J4.MH3 J4.MH4 SIM1.MH1 SIM1.MH2 U2.4 U4.4 X1.20 X1.22 X1.53 X1.54 X1.55 X1.56 X1.57 X1.58 X2.5 X2.6 X2.7 X2.8 X2.9 X2.10 X2.11 X2.14 X2.17 X2.18 X2.19 X2.20 X2.22 X2.26 X2.27 X2.28 X2.29 X2.33 X2.42 X2.43 X2.44 X2.45
copper on no net: | length 253
  Top Layer w0.2: 94.033,50.014 117.401,50.014 117.401,52.427 94.033,52.427 94.033,50.014
  Inner Layer 3 w0.2: 94.033,43.264 117.401,43.264 ; 94.033,43.264 94.033,45.677 117.401,45.677 117.401,43.264 ; 94.033,43.264 117.401,43.264
  Inner Layer 2 w0.2: 94.033,46.514 117.401,46.514 ; 94.033,46.514 94.033,48.927 117.401,48.927 117.401,46.514 ; 94.033,46.514 117.401,46.514
  Bottom Layer w0.2: 94.049,33.351 117.417,33.351 117.417,35.764 94.049,35.764 94.049,33.351
  other v1: 7.5,7.5

## Polygon pours and split planes (outlines as drawn)
GND on Inner Layer 2 "GND_L02_P002" (solid, remove dead copper, pour order 2): 0.5,49.5 79.5,49.5 79.5,0.5 0.5,0.5
GND on Top Layer "GND_L01_P004" (solid, remove dead copper, pour order 4): 0.5,49.5 79.5,49.5 79.5,0.5 0.5,0.5
NetC15_2 on Top Layer "NETC15_2_L01_P000" (solid, remove dead copper, pour order 0): 53.25,6.875 53.25,3.5 53.375,3.375 53.375,1.625 53.25,1.5 50.75,1.5 50.525,1.725 50.525,6.9 50.875,7.25 52.875,7.25
GND on Bottom Layer "GND_L04_P006" (solid, remove dead copper, pour order 6): 0.5,49.5 79.5,49.5 79.5,0.5 0.5,0.5
VCC3V3 on Inner Layer 3 "VCC3V3_L03_P008" (solid, remove dead copper, pour order 8): 0,50 80,50 80,0.5 0,0.5

## Keep-outs
Inner Layer 2:
  circle w0.25: c6.57,28.09 r0.5
  circle w0.25: c6.57,22.31 r0.5
Bottom Layer:
  circle w0.25: c6.57,22.31 r0.5
  circle w0.25: c6.57,28.09 r0.5
Keep-Out Layer:
  rectangle: 94.033,0.135 98.859,2.548
  lines w0.2: 94.033,0.135 94.033,2.548 117.401,2.548 117.401,0.135 94.033,0.135
  text "ROUTING KEEPOUT LAYER" at 100.637,0.821 h0.89

## Other copper
Top Layer:
  rectangle: 94.033,50.014 98.859,52.427
  pour cut-out: 6,25.75 6,21.75 6.25,21.5 7,21.5 7.25,21.75 7.25,25.75 9.96,25.75 9.96,28 7.25,28 7.25,28.75 7,29 6.25,29 6,28.75
  pour cut-out: 8.25,24.75 8.25,23.25 10.75,23.25 10.75,24.75
  text "TOP LAYER" at 100.637,50.7 h1.02
Inner Layer 3:
  rectangle: 94.033,43.264 98.859,45.677
  pour cut-out: 0,31 9,31 9,20 0,20
  text "INNER LAYER 3" at 100.637,43.95 h1.02
Inner Layer 2:
  rectangle: 94.033,46.514 98.859,48.927
  text "INNER LAYER 2" at 100.637,47.2 h1.02
Bottom Layer:
  region: 117.417,35.764 112.591,35.764 112.591,33.351 117.417,33.351
  text "BOTTOM LAYER" at 110.813,34.037 h1.02
Multi-Layer:
  rectangle: 94.033,9.121 98.859,11.534
  lines w0.2: 94.033,9.121 94.033,11.534 117.401,11.534 117.401,9.121 94.033,9.121
  text "MULTILAYER" at 100.637,9.807 h1.02

## Silkscreen, mask and mechanical layers (free items; w line width, h text height)
Top Overlay:
  rectangle: 94.033,59.759 98.859,62.172
  lines w0.2: 94.033,59.759 117.401,59.759 117.401,62.172 94.033,62.172 94.033,59.759
  text "TOP OVERLAY" at 100.637,60.444 h1.02
Bottom Overlay:
  region: 117.417,29.52 112.591,29.52 112.591,27.107 117.417,27.107
  lines w0.2: 94.049,27.107 117.417,27.107 117.417,29.52 94.049,29.52 94.049,27.107
  text "BOTTOM OVERLAY" at 110.813,27.793 h1.02
Top Paste:
  rectangle: 94.033,56.506 98.859,58.919
  lines w0.2: 94.033,56.506 94.033,58.919 117.401,58.919 117.401,56.506 94.033,56.506
  text "TOP PASTE" at 100.637,57.192 h1.02
Bottom Paste:
  region: 117.417,26.523 112.591,26.523 112.591,24.11 117.417,24.11
  lines w0.2: 94.049,24.11 117.417,24.11 117.417,26.523 94.049,26.523 94.049,24.11
  text "BOTTOM PASTE" at 110.813,24.795 h1.02
Top Solder:
  rectangle: 94.033,53.261 98.859,55.674
  lines w0.2: 94.033,53.261 117.401,53.261 117.401,55.674 94.033,55.674 94.033,53.261
  text "TOP SOLDER MASK" at 100.637,53.947 h1.02
Bottom Solder:
  region: 117.417,32.767 112.591,32.767 112.591,30.354 117.417,30.354
  lines w0.2: 94.049,30.354 117.417,30.354 117.417,32.767 94.049,32.767 94.049,30.354
  text "BOTTOM SOLDER MASK" at 110.813,31.04 h1.02
Drill Guide:
  rectangle: 94.033,6.112 98.859,8.525
  lines w0.2: 94.033,6.112 117.401,6.112 117.401,8.525 94.033,8.525 94.033,6.112
  text "DRILL GUIDE (SLOTS)" at 100.637,6.798 h1.02
Assembly TOP:
  rectangle: 94.033,18.124 98.859,20.537
  lines w0.2: 94.033,18.124 117.401,18.124 117.401,20.537 94.033,20.537 94.033,18.124
  text "TOP ASSEMBLY" at 100.637,18.809 h1.02
Assembly BOT:
  region: 117.442,17.639 112.616,17.639 112.616,15.226 117.442,15.226
  lines w0.2: 94.074,15.226 117.442,15.226 117.442,17.639 94.074,17.639 94.074,15.226
  text "BOTTOM ASSEMBLY" at 110.838,15.912 h1.02
Board:
  rectangle: 94.033,21.118 98.859,23.531
  lines w0.2: 0,0 80,0 80,50 0,50 0,0 ; 94.033,21.118 94.033,23.531 117.401,23.531 117.401,21.118 94.033,21.118
  text "BOARD OUTLINE" at 100.637,21.804 h1.02
Dimensions:
  rectangle: 94.033,12.132 98.859,14.545
  lines w0.2: 94.033,12.132 94.033,14.545 117.401,14.545 117.401,12.132 94.033,12.132
  text "DIMENSIONS" at 100.637,12.818 h1.02
Drill Drawing:
  drawing of 194 lines, arcs and shapes, not listed
  text "DRILL DRAWING" at 100.637,3.801 h1.02
  text "Symbol" at -4.163,-7.17 h1.83
  text "Count" at 8.686,-7.17 h1.83
  text "Hole Size" at 23.922,-7.17 h1.83
  text "Plated" at 53.124,-7.17 h1.83
  text "Hole Type" at 65.973,-7.17 h1.83
  text "Drill Layer Pair" at 84.612,-7.17 h1.83
  text "Via/Pad" at 122.7,-7.17 h1.83
  text "Pad Shape" at 137.682,-7.17 h1.83
  text "Template" at 156.626,-7.17 h1.83
  text "1" at 8.686,-10.98 h1.52
  text "1.100mm (43.31mil)" at 23.922,-10.98 h1.52
  text "NPTH" at 53.124,-10.98 h1.52
  text "Round" at 65.973,-10.98 h1.52
  text "Top Layer - Bottom Layer" at 84.612,-10.98 h1.52
  text "Pad" at 122.7,-10.98 h1.52
  text "Rounded" at 137.682,-10.98 h1.52
  text "c110hn110" at 156.626,-10.98 h1.52
  text "1" at 8.686,-14.79 h1.52
  text "1.200mm (47.24mil)" at 23.922,-14.79 h1.52
  text "NPTH" at 53.124,-14.79 h1.52
  text "Round" at 65.973,-14.79 h1.52
  text "Top Layer - Bottom Layer" at 84.612,-14.79 h1.52
  text "Pad" at 122.7,-14.79 h1.52
  text "Rounded" at 137.682,-14.79 h1.52
  text "c120hn120" at 156.626,-14.79 h1.52
  text "1" at 8.686,-18.6 h1.52
  text "1.600mm (62.99mil)" at 23.922,-18.6 h1.52
  text "NPTH" at 53.124,-18.6 h1.52
  text "Round" at 65.973,-18.6 h1.52
  text "Top Layer - Bottom Layer" at 84.612,-18.6 h1.52
  text "Pad" at 122.7,-18.6 h1.52
  text "Rounded" at 137.682,-18.6 h1.52
  text "c160hn160" at 156.626,-18.6 h1.52
  text "1" at 8.686,-22.41 h1.52
  text "1.700mm (66.93mil)" at 23.922,-22.41 h1.52
  text "NPTH" at 53.124,-22.41 h1.52
  text "Round" at 65.973,-22.41 h1.52
  text "Top Layer - Bottom Layer" at 84.612,-22.41 h1.52
  text "Pad" at 122.7,-22.41 h1.52
  text "Rounded" at 137.682,-22.41 h1.52
  text "c170hn170" at 156.626,-22.41 h1.52
  text "A" at -4.902,-22.664 h1.69
  text "1" at 8.686,-26.22 h1.52
  text "3.500mm (137.79mil)" at 23.922,-26.22 h1.52
  text "NPTH" at 53.124,-26.22 h1.52
  text "Round" at 65.973,-26.22 h1.52
  text "Top Layer - Bottom Layer" at 84.612,-26.22 h1.52
  text "Pad" at 122.7,-26.22 h1.52
  text "Rounded" at 137.682,-26.22 h1.52
  text "c350hn350" at 156.626,-26.22 h1.52
  text "B" at -4.902,-26.474 h1.69
  text "2" at 8.686,-30.03 h1.52
  text "0.600mm (23.62mil)" at 23.922,-30.03 h1.52
  text "PTH" at 53.124,-30.03 h1.52
  text "Slot" at 65.973,-30.03 h1.52
  text "Top Layer - Bottom Layer" at 84.612,-30.03 h1.52
  text "Pad" at 122.7,-30.03 h1.52
  text "Rounded" at 137.682,-30.03 h1.52
  text "r100_160h60_120r100" at 156.626,-30.03 h1.52
  text "2" at 8.686,-33.84 h1.52
  text "0.600mm (23.62mil)" at 23.922,-33.84 h1.52
  text "PTH" at 53.124,-33.84 h1.52
  text "Slot" at 65.973,-33.84 h1.52
  text "Top Layer - Bottom Layer" at 84.612,-33.84 h1.52
  text "Pad" at 122.7,-33.84 h1.52
  text "Rounded" at 137.682,-33.84 h1.52
  text "r100_210h60_170r100" at 156.626,-33.84 h1.52
  text "2" at 8.686,-37.65 h1.52
  text "0.700mm (27.56mil)" at 23.922,-37.65 h1.52
  text "NPTH" at 53.124,-37.65 h1.52
  text "Round" at 65.973,-37.65 h1.52
  text "Top Layer - Bottom Layer" at 84.612,-37.65 h1.52
  text "Pad" at 122.7,-37.65 h1.52
  text "Rounded" at 137.682,-37.65 h1.52
  text "c25hn70" at 156.626,-37.65 h1.52
  text "2" at 8.686,-41.46 h1.52
  text "1.100mm (43.31mil)" at 23.922,-41.46 h1.52
  text "PTH" at 53.124,-41.46 h1.52
  text "Round" at 65.973,-41.46 h1.52
  text "Top Layer - Bottom Layer" at 84.612,-41.46 h1.52
  text "Pad" at 122.7,-41.46 h1.52
  text "(Mixed)" at 137.682,-41.46 h1.52
  text "(Mixed)" at 156.626,-41.46 h1.52
  text "2" at 8.686,-45.27 h1.52
  text "4.200mm (165.35mil)" at 23.922,-45.27 h1.52
  text "PTH" at 53.124,-45.27 h1.52
  text "Round" at 65.973,-45.27 h1.52
  text "Top Layer - Bottom Layer" at 84.612,-45.27 h1.52
  text "Pad" at 122.7,-45.27 h1.52
  text "Rounded" at 137.682,-45.27 h1.52
  text "r600_480h420r100" at 156.626,-45.27 h1.52
  text "3" at 8.686,-49.08 h1.52
  text "0.800mm (31.50mil)" at 23.922,-49.08 h1.52
  text "PTH" at 53.124,-49.08 h1.52
  text "Round" at 65.973,-49.08 h1.52
  text "Top Layer - Bottom Layer" at 84.612,-49.08 h1.52
  text "Pad" at 122.7,-49.08 h1.52
  text "(Mixed)" at 137.682,-49.08 h1.52
  text "(Mixed)" at 156.626,-49.08 h1.52
  text "4" at 8.686,-52.89 h1.52
  text "1.700mm (66.93mil)" at 23.922,-52.89 h1.52
  text "PTH" at 53.124,-52.89 h1.52
  text "Round" at 65.973,-52.89 h1.52
  text "Top Layer - Bottom Layer" at 84.612,-52.89 h1.52
  text "Pad" at 122.7,-52.89 h1.52
  text "Rounded" at 137.682,-52.89 h1.52
  text "c270h170" at 156.626,-52.89 h1.52
  text "4" at 8.686,-56.7 h1.52
  text "3.300mm (129.92mil)" at 23.922,-56.7 h1.52
  text "NPTH" at 53.124,-56.7 h1.52
  text "Round" at 65.973,-56.7 h1.52
  text "Top Layer - Bottom Layer" at 84.612,-56.7 h1.52
  text "Pad" at 122.7,-56.7 h1.52
  text "Rounded" at 137.682,-56.7 h1.52
  text "c330hn330" at 156.626,-56.7 h1.52
  text "11" at 8.686,-60.51 h1.52
  text "1.000mm (39.37mil)" at 23.922,-60.51 h1.52
  text "PTH" at 53.124,-60.51 h1.52
  text "Round" at 65.973,-60.51 h1.52
  text "Top Layer - Bottom Layer" at 84.612,-60.51 h1.52
  text "Pad" at 122.7,-60.51 h1.52
  text "Rounded" at 137.682,-60.51 h1.52
  text "(Mixed)" at 156.626,-60.51 h1.52
  text "16" at 8.686,-64.32 h1.52
  text "0.900mm (35.43mil)" at 23.922,-64.32 h1.52
  text "PTH" at 53.124,-64.32 h1.52
  text "Round" at 65.973,-64.32 h1.52
  text "Top Layer - Bottom Layer" at 84.612,-64.32 h1.52
  text "Pad" at 122.7,-64.32 h1.52
  text "(Mixed)" at 137.682,-64.32 h1.52
  text "(Mixed)" at 156.626,-64.32 h1.52
  text "59" at 8.686,-68.13 h1.52
  text "0.500mm (19.69mil)" at 23.922,-68.13 h1.52
  text "PTH" at 53.124,-68.13 h1.52
  text "Round" at 65.973,-68.13 h1.52
  text "Top Layer - Bottom Layer" at 84.612,-68.13 h1.52
  text "Via" at 122.7,-68.13 h1.52
  text "Rounded" at 137.682,-68.13 h1.52
  text "v100h50m0mx0" at 156.626,-68.13 h1.52
  text "291" at 8.686,-71.94 h1.52
  text "0.300mm (11.81mil)" at 23.922,-71.94 h1.52
  text "PTH" at 53.124,-71.94 h1.52
  text "Round" at 65.973,-71.94 h1.52
  text "Top Layer - Bottom Layer" at 84.612,-71.94 h1.52
  text "Via" at 122.7,-71.94 h1.52
  text "Rounded" at 137.682,-71.94 h1.52
  text "v72h30m0mx0" at 156.626,-71.94 h1.52
  text "403 Total" at 8.686,-75.75 h1.52
  text "Slot definitions :" at -4.163,-79.432 h1.52
  text "Routed Path Length" at 22.068,-79.432 h1.52
  text "= Calculated from tool start centre position to tool end centre position." at 50.075,-79.432 h1.52
  text "Hole Length" at 22.068,-81.972 h1.52
  text "= Routed Path Length + Tool Size = Slot length as defined in the PCB layout" at 39.665,-81.972 h1.52

## Dimensions
0,50 to 80,50 on Dimensions
0,50 to 0,0 on Dimensions

## Text inside footprints (layer, text, board x,y; h text height)
C2: Top Overlay "+" at 18.4,13.9 h1.52 r270
C3: Top Overlay "+" at 38.275,2.775 h1.52 r90
C8: Top Overlay "+" at 23.45,40.2 h1.52 r180
C9: Top Overlay "+" at 33.725,32.875 h1.52
C13: Top Overlay "+" at 34.05,30.45 h1.52 r270
C32: Bottom Overlay "+" at 25.55,49.675 h1.52 r180
C34: Top Overlay "+" at 50.35,44.125 h1.52 r270
J2: Top Overlay "1" at 18.9,48.01 h2; Assembly TOP "1" at 19.6,48.35 h1.5; Top Assembly "1" at 19.475,48.15 h1.5; Courtyard TOP "1" at 19.45,48.3 h1.5
J6: Assembly TOP "1" at 76.35,42.425 h1.5; Top Assembly "1" at 76.25,42.525 h1.5; Courtyard TOP "1" at 76.25,42.45 h1.5